# EAGLE board amp (EAGLE 8.0.0)
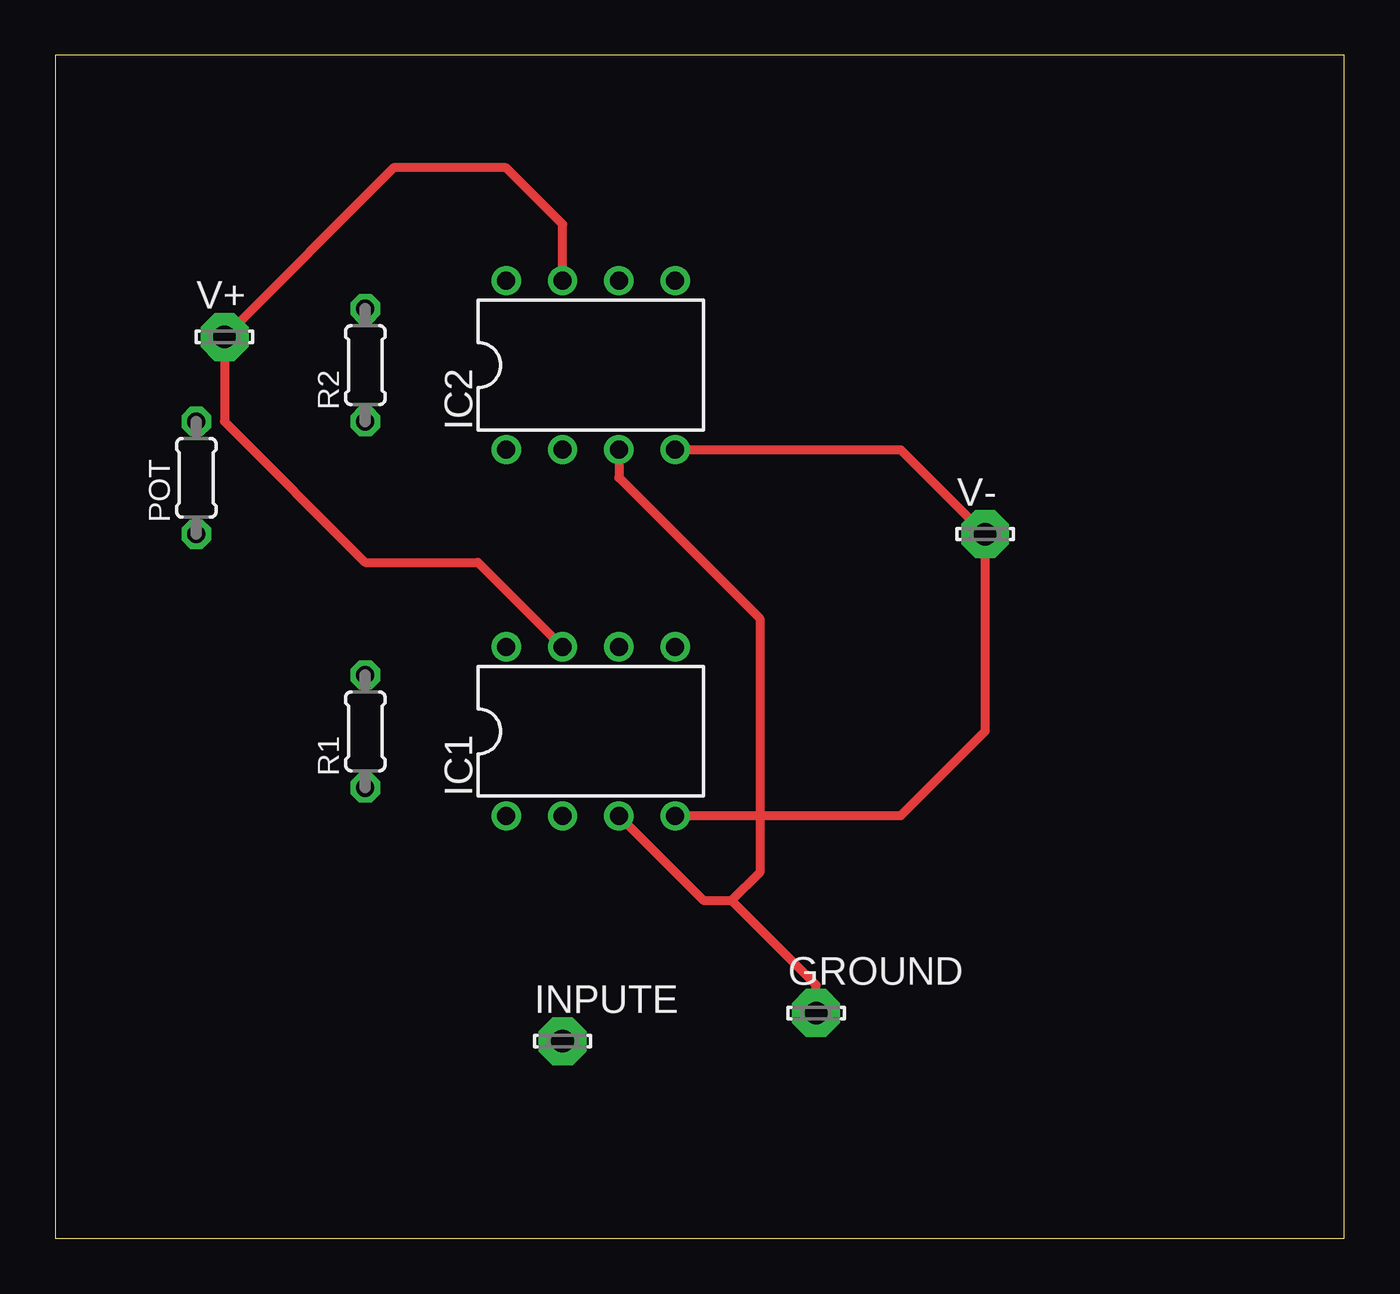
[diagram p0: board, top side]
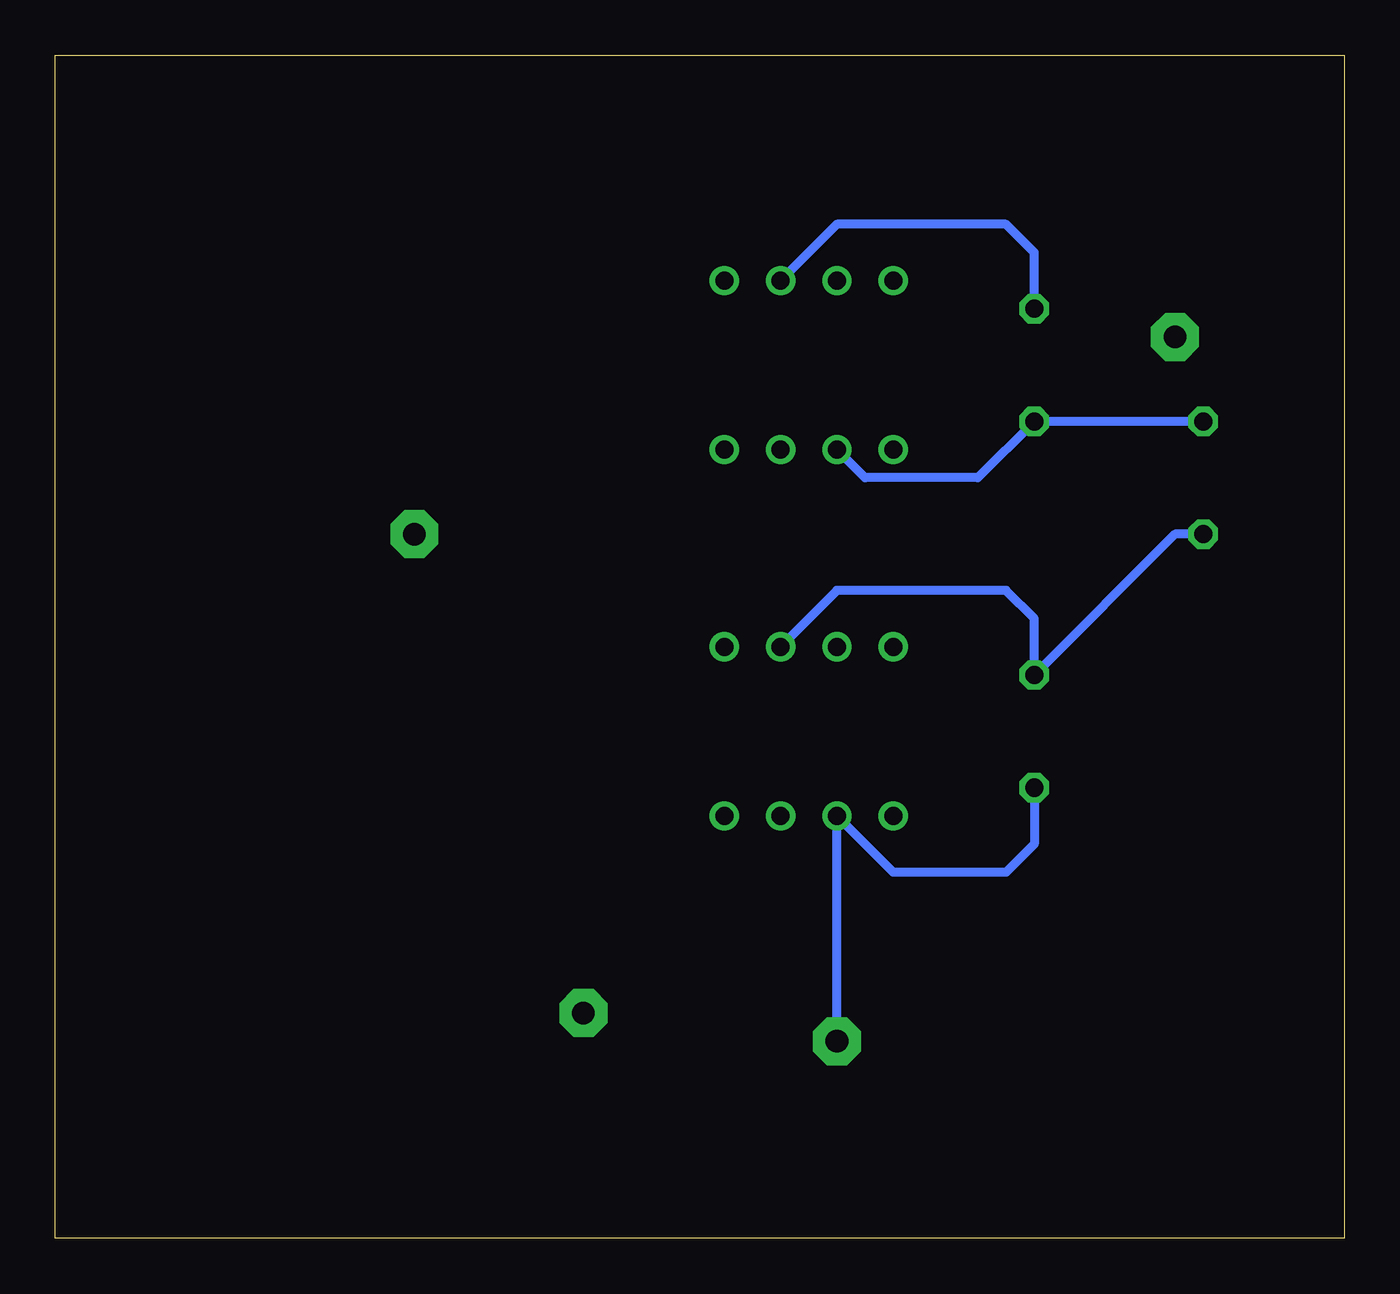
[diagram p1: board, bottom side, seen from below]

Size 58.09 x 53.33 mm. Coordinates in mm from the lower left corner, seen from the top.
Outline: 0,0 58.09,0 58.09,53.33 0,53.33 0,0
Copper layers (1*16): Top 0.035mm / dielectric 1.5mm / Bottom 0.035mm
Design rules "default": minimum track width 10mil, minimum drill 24mil, track to track 8mil, track to pad 8mil, pad to pad 8mil, via to via 8mil, smd to smd 8mil, copper to edge 40mil, drill to drill 8mil, minimum pad ring 10mil, minimum via ring 8mil, stop-mask expansion 4mil, vias tented up to drill 0mil, thermal gap 10mil

## Footprints (pad centres in the part's own frame; a part is rotated, then mirrored left to right if it is on the bottom)
LSP10 = drill 1.016 pad 2.159 octagon: MP 0,0
DIL08 = drill 0.813 pad 1.27: 1 -3.81,-3.81; 2 -1.27,-3.81; 3 1.27,-3.81; 4 3.81,-3.81; 5 3.81,3.81; 6 1.27,3.81; 7 -1.27,3.81; 8 -3.81,3.81
0204/5 = drill 0.813 octagon: 1 -2.54,0; 2 2.54,0

## Placement (x,y rotation side)
GROUND  LSP10  [LSP10]  34.29,10.16 0 top
IC1  LF356N  [DIL08]  24.13,22.86 0 top
IC2  LF356N  [DIL08]  24.13,39.37 0 top
INPUTE  LSP10  [LSP10]  22.86,8.89 0 top
POT  500K  [0204/5]  6.35,34.29 90 top
R1  500K  [0204/5]  13.97,22.86 90 top
R2  5K  [0204/5]  13.97,39.37 90 top
V+  LSP10  [LSP10]  7.62,40.64 0 top
V-  LSP10  [LSP10]  41.91,31.75 0 top

## Library data of the parts
GROUND INPUTE V+ V- = solpad
IC1 IC2 = linear
POT R1 R2 = resistor

## Nets
N$1: IC1.6 POT.1 R1.2
N$2: IC1.2 INPUTE.MP R1.1
N$3: IC1.4 IC2.4 V-.MP
N$4: IC2.2 POT.2 R2.1
N$5: IC2.6 R2.2
N$6: IC1.7 IC2.7 V+.MP
N$7: GROUND.MP IC1.3 IC2.3

## Tracks (layer width: path | path; a pad name or v marks a point on that pad's centre or on a via)
N$1
  Bottom 0.406: IC1.6 22.86,29.21 15.24,29.21 13.97,27.94 R1.2 7.62,31.75 POT.1
N$2
  Bottom 0.406: R1.1 13.97,17.78 15.24,16.51 20.32,16.51 IC1.2 INPUTE.MP
N$3
  Top 0.406: IC2.4 38.1,35.56 V-.MP 41.91,22.86 38.1,19.05 IC1.4
N$4
  Bottom 0.406: IC2.2 21.59,34.29 16.51,34.29 R2.1 POT.2
N$5
  Bottom 0.406: R2.2 13.97,44.45 15.24,45.72 22.86,45.72 IC2.6
N$6
  Top 0.406: IC2.7 22.86,45.72 20.32,48.26 15.24,48.26 V+.MP 7.62,36.83 13.97,30.48 19.05,30.48 IC1.7
N$7
  Top 0.406: IC2.3 25.4,34.29 31.75,27.94 31.75,16.51 30.48,15.24 | 30.48,15.24 29.21,15.24 IC1.3 | GROUND.MP 34.29,11.43 30.48,15.24